# EAGLE board main ( line followers ) (EAGLE 9.6.2)
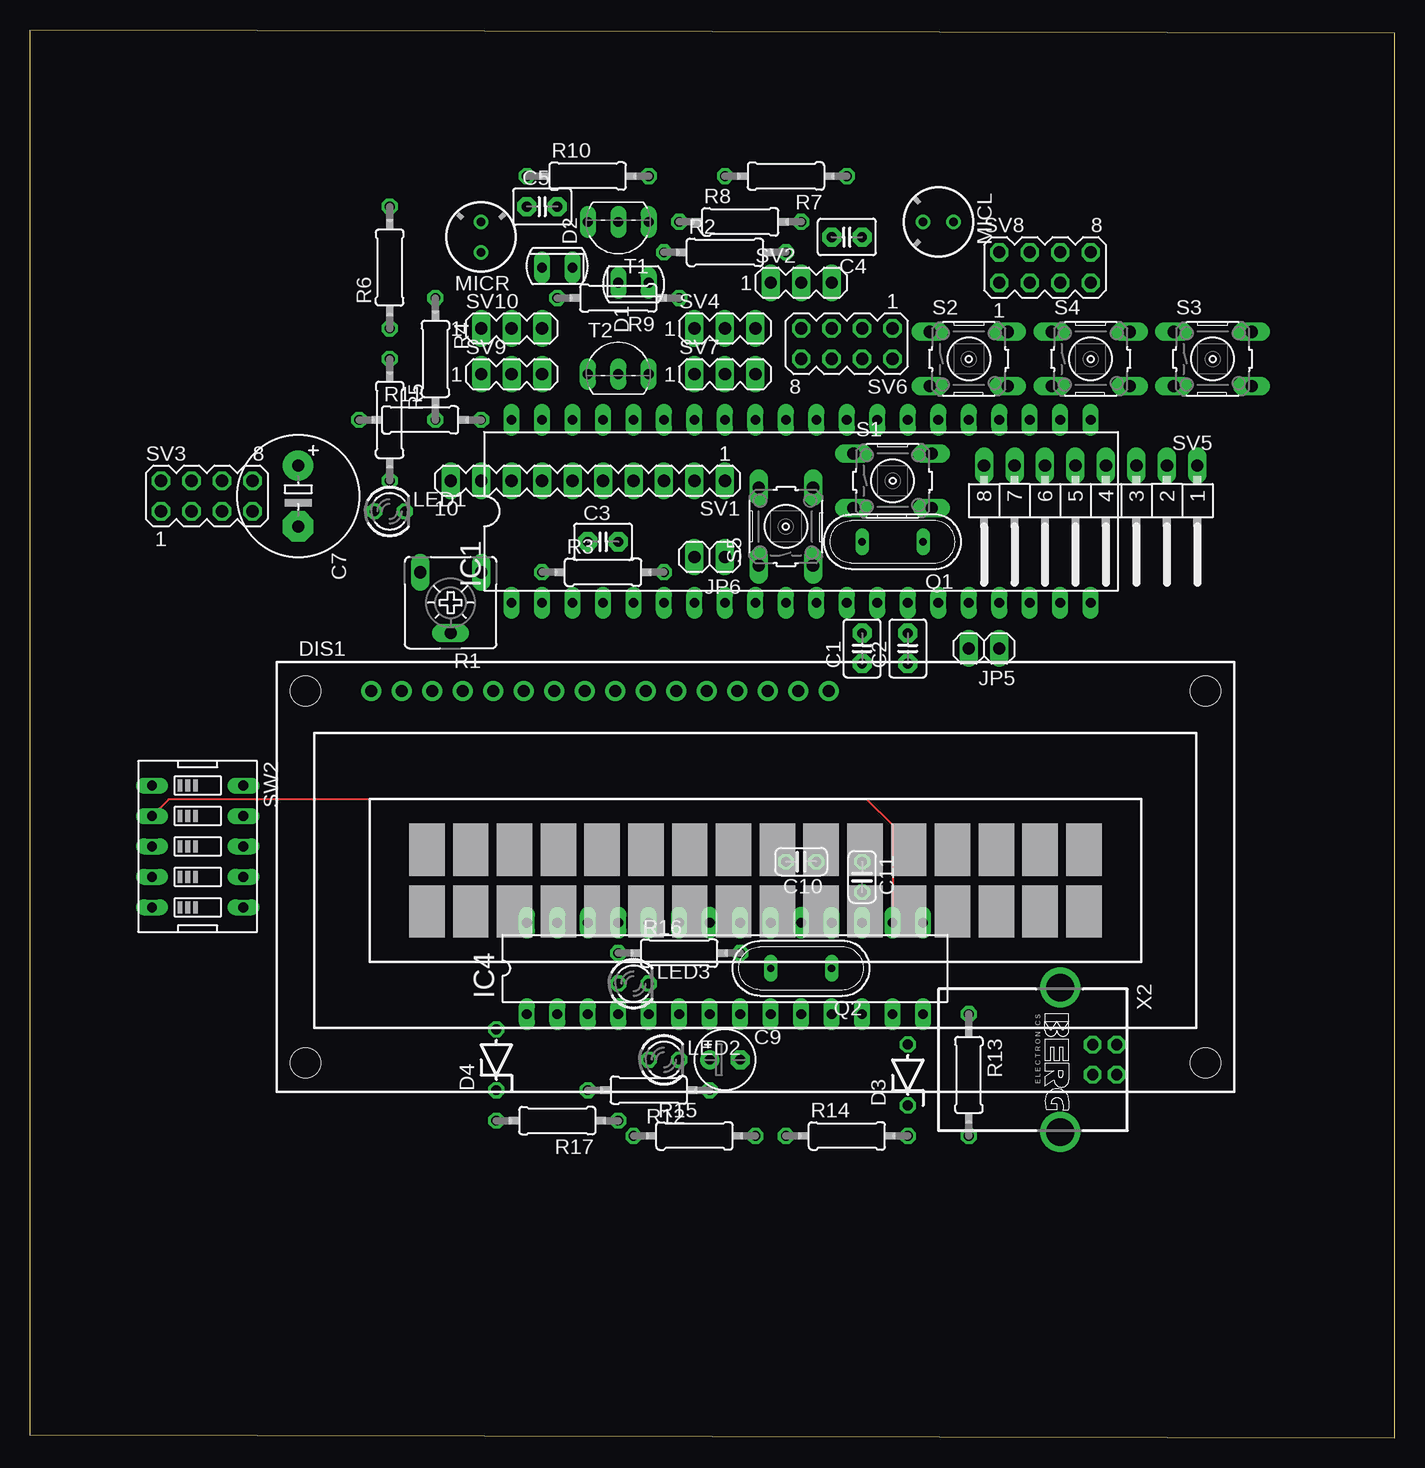
[diagram p0: board, top side]
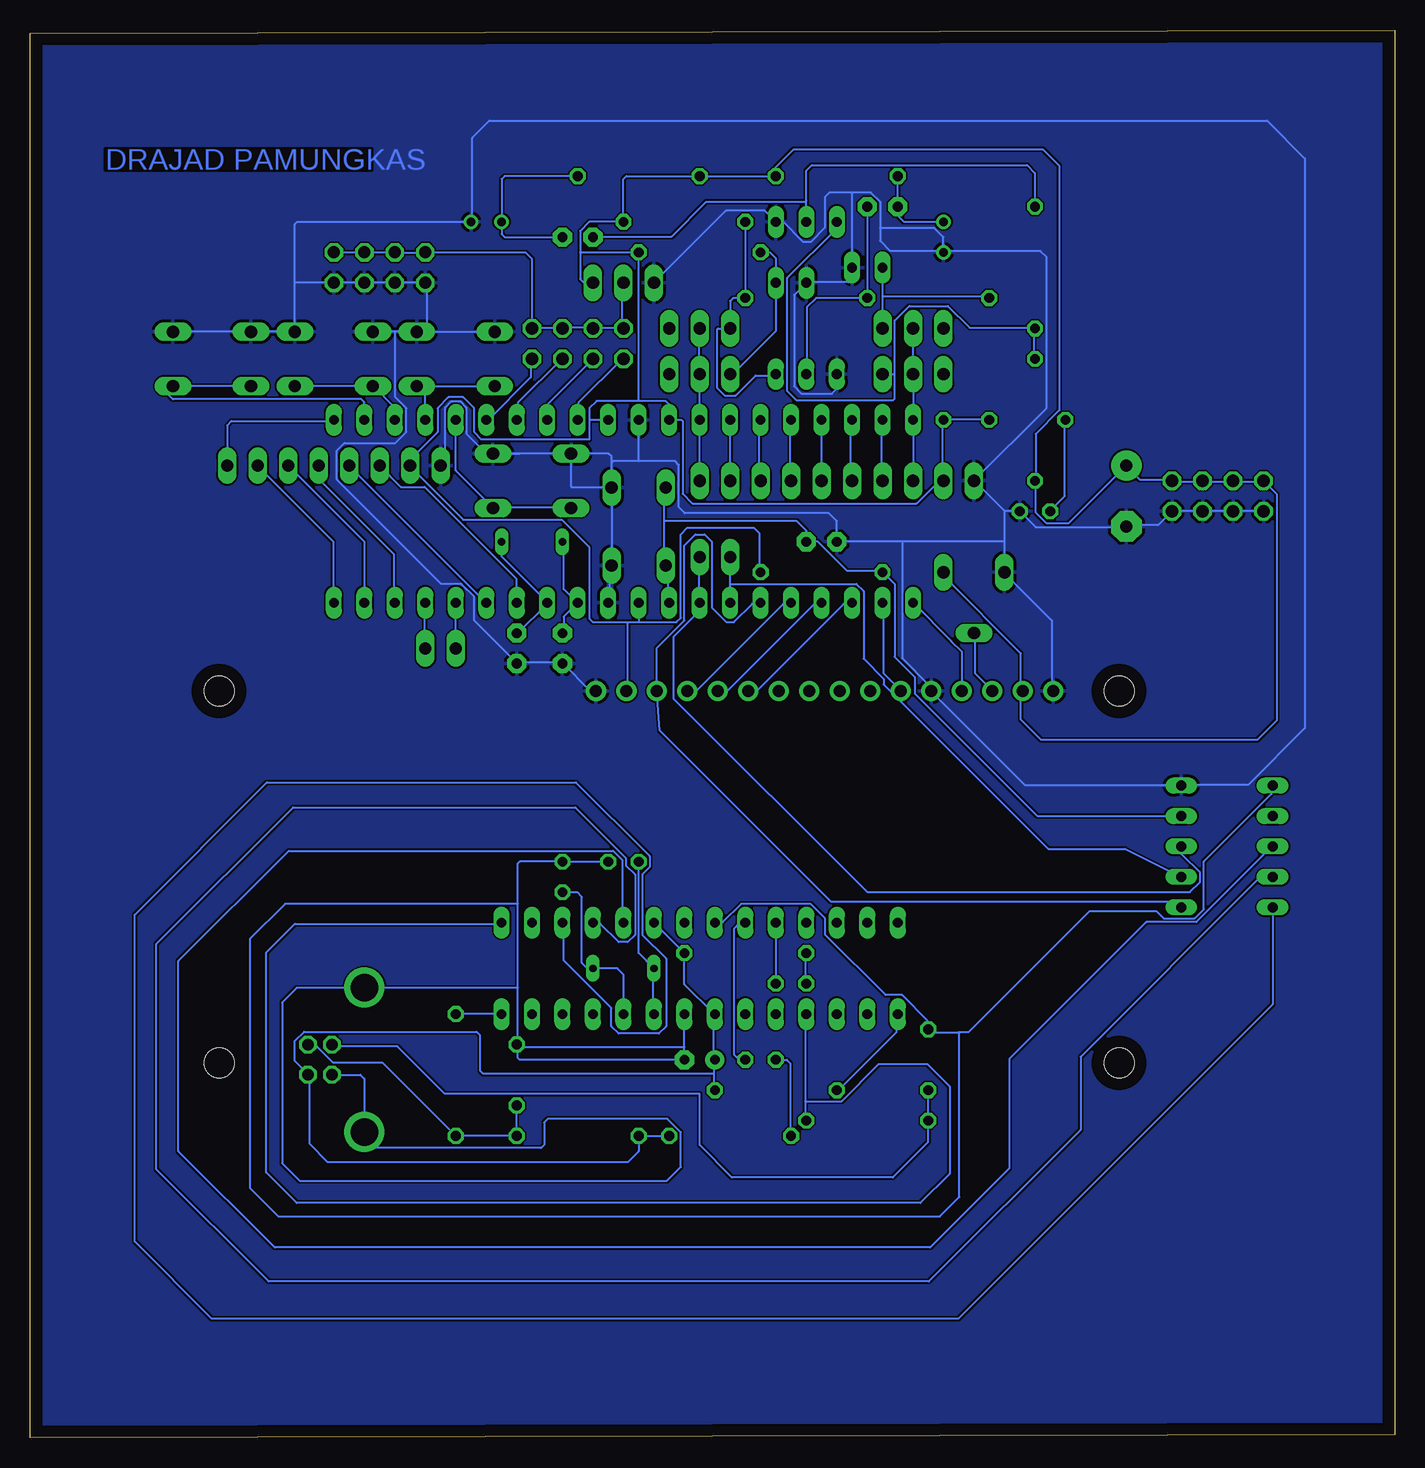
[diagram p1: board, bottom side, seen from below]

Size 113.72 x 117.34 mm. Coordinates in mm from the lower left corner, seen from the top.
Outline: 0,0.25 113.72,0 113.72,117.08 0,117.34 0,0.25
Copper layers (1*16): Top 0.035mm / dielectric 1.5mm / Bottom 0.035mm
Design rules "default": minimum track width 6mil, minimum drill 0.35mm, track to track 6mil, track to pad 6mil, pad to pad 6mil, via to via 6mil, smd to smd 6mil, copper to edge 40mil, drill to drill 6mil, minimum pad ring 10mil, minimum via ring 8mil, stop-mask expansion 4mil, vias tented up to drill 0mil, thermal gap 10mil

## Footprints (pad centres in the part's own frame; a part is rotated, then mirrored left to right if it is on the bottom)
C2.5-3 = drill 0.813 pad 1.6 octagon: 1 -1.27,0; 2 1.27,0
E5-10,5 = drill 1.016 pad 2.54: + -2.54,0 | drill 1.016 pad 2.54 octagon: - 2.54,0
E2,5-5 = drill 0.813 pad 1.6: + -1.27,0 | drill 0.813 pad 1.6 octagon: - 1.27,0
C025-024X044 = drill 0.813 octagon: 1 -1.27,0; 2 1.27,0
SFH225 = drill 0.813 long: A 0,1.27; K 0,-1.27
ZDIO-5 = drill 0.813 octagon: A 2.54,0; C -2.54,0
TUXGR_16X2_R2 = drill 1 pad 1.676: 1 -32,15.5; 2 -29.46,15.5; 3 -26.92,15.5; 4 -24.38,15.5; 5 -21.84,15.5; 6 -19.3,15.5; 7 -16.76,15.5; 8 -14.22,15.5; 9 -11.68,15.5; 10 -9.14,15.5; 11 -6.6,15.5; 12 -4.06,15.5; 13 -1.52,15.5; 14 1.02,15.5; 15 3.56,15.5; 16 6.1,15.5 | hole 2.5: -37.5,-15.5; 37.5,-15.5; -37.5,15.5; 37.5,15.5
DIL40 = drill 0.813 long: 1 -24.13,-7.62; 2 -21.59,-7.62; 3 -19.05,-7.62; 4 -16.51,-7.62; 5 -13.97,-7.62; 6 -11.43,-7.62; 7 -8.89,-7.62; 8 -6.35,-7.62; 9 -3.81,-7.62; 10 -1.27,-7.62; 11 1.27,-7.62; 12 3.81,-7.62; 13 6.35,-7.62; 14 8.89,-7.62; 15 11.43,-7.62; 16 13.97,-7.62; 17 16.51,-7.62; 18 19.05,-7.62; 19 21.59,-7.62; 20 24.13,-7.62; 21 24.13,7.62; 22 21.59,7.62; 23 19.05,7.62; 24 16.51,7.62; 25 13.97,7.62; 26 11.43,7.62; 27 8.89,7.62; 28 6.35,7.62; 29 3.81,7.62; 30 1.27,7.62; 31 -1.27,7.62; 32 -3.81,7.62; 33 -6.35,7.62; 34 -8.89,7.62; 35 -11.43,7.62; 36 -13.97,7.62; 37 -16.51,7.62; 38 -19.05,7.62; 39 -21.59,7.62; 40 -24.13,7.62
DIL28-3 = drill 0.813 long: 1 -16.51,-3.81; 2 -13.97,-3.81; 3 -11.43,-3.81; 4 -8.89,-3.81; 5 -6.35,-3.81; 6 -3.81,-3.81; 7 -1.27,-3.81; 8 1.27,-3.81; 9 3.81,-3.81; 10 6.35,-3.81; 11 8.89,-3.81; 12 11.43,-3.81; 13 13.97,-3.81; 14 16.51,-3.81; 15 16.51,3.81; 16 13.97,3.81; 17 11.43,3.81; 18 8.89,3.81; 19 6.35,3.81; 20 3.81,3.81; 21 1.27,3.81; 22 -1.27,3.81; 23 -3.81,3.81; 24 -6.35,3.81; 25 -8.89,3.81; 26 -11.43,3.81; 27 -13.97,3.81; 28 -16.51,3.81
1X02 = drill 1.016 long: 1 -1.27,0; 2 1.27,0
LED3MM = drill 0.813 octagon: A -1.27,0; K 1.27,0
F6050AP = drill 0.7 pad 1.2: 1 0,1.27; 2 0,-1.27
QS = drill 0.61 long: 1 -2.54,0; 2 2.54,0
CA6V = drill 1.016 long: A -2.54,-2.54; E 2.54,-2.54; S 0,2.54
0207/10 = drill 0.813 octagon: 1 -5.08,0; 2 5.08,0
B3F-10XX = drill 1.016 long: 1 -3.251,2.261; 2 3.251,2.261; 3 -3.251,-2.261; 4 3.251,-2.261
MA10-1 = drill 1.016 long: 1 -11.43,0; 2 -8.89,0; 3 -6.35,0; 4 -3.81,0; 5 -1.27,0; 6 1.27,0; 7 3.81,0; 8 6.35,0; 9 8.89,0; 10 11.43,0
MA03-1 = drill 1.016 long: 1 -2.54,0; 2 0,0; 3 2.54,0
MA04-2 = drill 1.016 octagon: 1 -3.81,-1.27; 2 -3.81,1.27; 3 -1.27,-1.27; 4 -1.27,1.27; 5 1.27,-1.27; 6 1.27,1.27; 7 3.81,-1.27; 8 3.81,1.27
MA08-1W = drill 1.016 long: 1 -8.89,0; 2 -6.35,0; 3 -3.81,0; 4 -1.27,0; 5 1.27,0; 6 3.81,0; 7 6.35,0; 8 8.89,0
EDG-05 = drill 0.813 long: 1 -5.08,-3.81; 2 -2.54,-3.81; 3 0,-3.81; 4 2.54,-3.81; 5 5.08,-3.81; 6 5.08,3.81; 7 2.54,3.81; 8 0,3.81; 9 -2.54,3.81; 10 -5.08,3.81
TO92-EBC = drill 0.813 long: B 0,-1.27; C 2.54,-1.27; E -2.54,-1.27
PN61729-S = drill 0.95 octagon: 1 1.25,4.71; 2 -1.25,4.71; 3 -1.25,2.71; 4 1.25,2.71 | drill 2.3 pad 2.9: S1 -6.02,0; S2 6.02,0

## Placement (x,y rotation side)
C1  22p  [C2.5-3]  69.34,65.79 90 top
C2  22p  [C2.5-3]  73.15,65.79 90 top
C3  10nF  [C2.5-3]  47.75,74.68 0 top
C4  100nF  [C2.5-3]  68.07,100.08 180 top
C5  100nF  [C2.5-3]  42.67,102.62 0 top
C7  1000uF/16V  [E5-10,5]  22.35,78.49 270 top
C9  10uF/16V  [E2,5-5]  57.91,31.5 0 top
C10  22pF  [C025-024X044]  64.26,48.01 180 top
C11  22pF  [C025-024X044]  69.34,46.74 270 top
D1  SFH225  [SFH225]  50.29,96.27 270 top
D2  SFH225  [SFH225]  43.94,97.54 90 top
D3  DZ3,6V  [ZDIO-5]  73.15,30.23 90 top
D4  DZ3,6V  [ZDIO-5]  38.86,31.5 90 top
DIS1  TUXGR_16X2_R2  [TUXGR_16X2_R2]  60.45,46.74 0 top
IC1  MEGA16-P  [DIL40]  64.26,77.22 0 top
IC4  MEGA8-P  [DIL28-3]  57.91,39.12 0 top
JP5  [1X02]  79.5,65.79 180 top
JP6  [1X02]  56.64,73.41 180 top
LED1  merah  [LED3MM]  29.97,77.22 0 top
LED2  Merah  [LED3MM]  52.83,31.5 0 top
LED3  hijau  [LED3MM]  50.29,37.85 0 top
MICL  MC  [F6050AP]  75.69,101.35 270 top
MICR  MC  [F6050AP]  37.59,100.08 180 top
Q1  8MHz  [QS]  71.88,74.68 180 top
Q2  12MHz  [QS]  64.26,39.12 180 top
R1  20K  [CA6V]  35.05,69.6 180 top
R2  56K  [0207/10]  57.91,98.81 0 top
R3  10K  [0207/10]  47.75,72.14 0 top
R4  56K  [0207/10]  33.78,89.92 270 top
R5  10K  [0207/10]  29.97,84.84 270 top
R6  100K  [0207/10]  29.97,97.54 90 top
R7  10K  [0207/10]  62.99,105.16 180 top
R8  10K  [0207/10]  59.18,101.35 0 top
R9  100K  [0207/10]  49.02,95 180 top
R10  10K  [0207/10]  46.48,105.16 0 top
R11  330  [0207/10]  32.51,84.84 0 top
R12  10K  [0207/10]  51.56,28.96 180 top
R13  68  [0207/10]  78.23,30.23 270 top
R14  2K2  [0207/10]  68.07,25.15 0 top
R15  330  [0207/10]  55.37,25.15 0 top
R16  330  [0207/10]  54.1,40.39 0 top
R17  68  [0207/10]  43.94,26.42 180 top
S1  [B3F-10XX]  71.88,79.76 0 top
S2  [B3F-10XX]  78.23,89.92 0 top
S3  [B3F-10XX]  98.55,89.92 0 top
S4  [B3F-10XX]  88.39,89.92 0 top
S5  [B3F-10XX]  62.99,75.95 90 top
SV1  [MA10-1]  46.48,79.76 180 top
SV2  [MA03-1]  64.26,96.27 0 top
SV3  [MA04-2]  14.73,78.49 0 top
SV4  [MA03-1]  57.91,92.46 0 top
SV5  [MA08-1W]  88.39,81.03 180 top
SV6  [MA04-2]  68.07,91.19 180 top
SV7  [MA03-1]  57.91,88.65 0 top
SV8  [MA04-2]  84.58,97.54 0 top
SV9  [MA03-1]  40.13,88.65 0 top
SV10  [MA03-1]  40.13,92.46 0 top
SW2  [EDG-05]  13.97,49.28 270 top
T1  [TO92-EBC]  49.02,100.08 180 top
T2  [TO92-EBC]  49.02,89.92 0 top
X2  PN61729-S  [PN61729-S]  85.85,31.5 270 top

## Library data of the parts
C1-C5 = capacitor-wima
C7 C9-C11 R2-R11 = rcl
D1 D2 = opto-trans-siemens; OC_FARNELL: unknown; OC_NEWARK: unknown
D3 D4 = diode
DIS1 = display-lcd; OC_FARNELL: unknown; OC_NEWARK: unknown
IC1 = atmel; MPN: ATMEGA16-16PU; OC_FARNELL: 9171142; OC_NEWARK: 01M6885
IC4 = atmel
JP5 JP6 = pinhead
LED1-LED3 = led
MICL MICR = microphon
Q1 Q2 SW2 = special
R1 = pot
R12-R17 = resistor
S1-S5 = switch-omron; MPN: B3F-1000; OC_FARNELL: 176432; OC_NEWARK: 36M3542
SV1-SV10 = con-lstb; OC_FARNELL: unknown; OC_NEWARK: unknown
T1 T2 = transistor
X2 = con-berg

## Nets
DGND: C9.- C10.1 C11.1 D3.A D4.A IC4.8 IC4.22 SW2.1 X2.4 X2.S1 X2.S2
GND: C1.1 C2.1 C3.1 C7.- D1.K D2.K DIS1.1 DIS1.5 DIS1.16 IC1.11 IC1.31 LED1.K MICL.1 MICR.1 R1.E S1.1 S1.2 S2.1 S2.2 S3.1 S3.2 S4.1 S4.2 S5.3 S5.4 SV1.10 SV2.1 SV3.1 SV3.3 SV3.5 SV3.7 SV5.8 SV8.1 SV8.3 SV8.5 SV8.7 SW2.10 T1.E T2.E
MISO: IC1.7 JP6.2 SW2.7
MOSI: DIS1.14 IC1.6 SW2.6
N$1: IC1.33 SV1.1 SV4.2 SV7.2
N$2: IC1.34 SV1.2
N$3: IC1.35 SV1.3
N$4: IC1.36 SV1.4
N$5: IC1.37 SV1.5
N$6: IC1.38 SV1.6
N$7: IC1.39 SV1.7
N$8: D2.A R4.1 SV10.3
N$9: IC1.24 S2.3 S2.4
N$10: DIS1.13 IC1.5
N$11: DIS1.12 IC1.4
N$12: DIS1.11 IC1.3
N$13: DIS1.6 IC1.2
N$14: R5.1 R6.1 SV9.3 T1.C
N$15: DIS1.3 R1.S
N$16: C1.2 IC1.12 Q1.2
N$17: C2.2 IC1.13 Q1.1
N$18: DIS1.4 IC1.1
N$19: D1.A R2.1 SV7.1
N$20: IC1.23 S4.3 S4.4
N$21: IC1.40 SV1.8 SV9.2 SV10.2
N$22: C4.2 R6.2 T1.B
N$23: C4.1 MICL.2 R7.1
N$24: R8.1 R9.1 SV4.1 T2.C
N$25: C5.2 R9.2 T2.B
N$26: C5.1 MICR.2 R10.1
N$27: IC1.22 S3.3 S3.4
N$28: IC1.25 S1.3 S1.4
N$30: IC1.21 SV5.1
N$32: IC1.20 SV5.2
N$33: IC1.19 SV5.3
N$34: IC1.18 SV5.4
N$35: IC1.15 SV5.5
N$36: IC1.14 SV5.6
N$37: IC1.16 JP5.2
N$38: IC1.17 JP5.1
N$41: LED1.A R11.1
N$42: IC4.1 R12.2
N$44: IC1.26 SV6.2
N$45: IC1.27 SV6.4
N$46: IC1.28 SV6.6
N$47: IC1.29 SV6.8
N$51: C10.2 IC4.9 Q2.2
N$52: C11.2 IC4.10 Q2.1
N$53: IC4.14 R13.1
N$55: LED2.A R15.1
N$56: LED3.A R16.1
N$57: IC4.23 LED2.K
N$58: IC4.24 LED3.K
N$59: D4.C R17.2 X2.3
N$67: IC4.4 IC4.15 R17.1
N$69: D3.C R13.2 R14.2 X2.2
N$175: IC4.17 SW2.5
N$176: IC4.18 SW2.4
N$177: IC4.19 SW2.3
N$178: IC4.16 SW2.2
RESET: C3.2 IC1.9 R3.1 S5.1 S5.2 SW2.9
SCK: IC1.8 JP6.1 SW2.8
VCC: C7.+ DIS1.2 DIS1.15 IC1.10 IC1.30 IC1.32 R1.A R2.2 R3.2 R4.2 R5.2 R7.2 R8.2 R10.2 R11.2 SV1.9 SV2.3 SV3.2 SV3.4 SV3.6 SV3.8 SV5.7
VDD: SV2.2 SV6.1 SV6.3 SV6.5 SV6.7 SV8.2 SV8.4 SV8.6 SV8.8
VPP: C9.+ IC4.7 IC4.20 R12.1 R14.1 R15.2 R16.2 X2.1

## Tracks (layer width: path | path; a pad name or v marks a point on that pad's centre or on a via)
DGND
  Bottom 0.152: X2.4 86.18,30.25 85.85,29.92 X2.S2 85.85,24.38 85.6,24.13 71.12,24.13 70.87,24.38 70.87,26.26 70.56,26.57 60.6,26.57 59.49,25.45 59.49,22.55 60.66,21.39 91.24,21.39 92.71,22.86 92.71,36.27 91.49,37.49 85.85,37.49 | 59.18,32.56 C9.- 72.9,31.5 73.05,31.65 73.05,32.56 | 59.18,32.56 IC4.8 | 73.05,32.87 73.05,37.49 | 73.05,37.49 73.05,44.5 | 73.05,44.5 73.05,47.85 72.9,48.01 C11.1 C10.1 | 73.05,32.56 59.18,32.56 | 73.05,37.49 85.85,37.49 | 85.85,37.49 X2.S1 | 73.05,44.5 92.46,44.5 95.4,41.55 95.4,20.83 93.02,18.44 37.9,18.44 36.27,20.07 36.27,33.73 36.32,33.78 | 36.32,33.78 38.61,33.78 D4.A 38.91,34.14 38.91,34.75 41.05,36.88 42.42,36.88 47.45,41.91 47.45,43.28 48.67,44.5 54.46,44.5 55.98,42.98 56.59,42.98 IC4.22 | 73.05,32.56 73.05,32.87 | D3.A 73.05,32.87 | SW2.1 10.26,54.25 10.26,53.64 15.9,48.01 15.9,44.04 16.66,43.28 19.25,43.28 19.86,43.89 25.42,43.89 35.53,33.78 36.32,33.78
GND
  Bottom 0.152: T2.E 46.48,87.43 46.89,87.02 49.43,87.02 50.04,87.63 50.04,95.25 D1.K 48.97,96.32 45.52,96.32 45.21,96.62 D2.K 45.21,103.78 | 42.88,100.84 42.88,103.02 43.64,103.78 45.21,103.78 | 42.88,100.84 42.88,99.77 42.01,98.91 29.51,98.91 29.01,98.4 29.01,85.8 SV1.10 34.95,79.7 32.51,77.27 | 45.21,103.78 47.09,103.78 47.45,103.43 47.45,100.89 48.67,99.67 49.28,99.67 50.95,101.35 T1.E 52.48,102.26 55.73,102.26 SV2.1 | 65.28,72.69 65.43,72.54 65.43,69.65 IC1.11 | 62.99,81.38 IC1.31 | 65.28,72.69 S5.3 | 13.46,77.27 11.02,77.27 SV3.1 | 13.46,77.27 15.9,77.27 SV3.5 16.05,77.27 18.49,77.27 SV3.7 19.71,76.05 22.3,76.05 C7.- 22.45,75.9 29.92,75.9 LED1.K 31.29,77.27 32.51,77.27 | 13.46,77.27 SV3.3 | 32.51,77.27 32.51,74.68 | 32.51,74.68 R1.E 32.51,72.09 28.55,68.12 28.55,62.33 DIS1.1 | 32.51,74.68 41.05,74.68 | 41.05,74.68 C3.1 46.48,76.4 47.14,77.06 59.16,77.06 59.64,77.55 59.64,81.08 59.94,81.38 62.99,81.38 | 41.05,74.68 41.05,64.97 38.76,62.69 38.76,62.33 DIS1.5 38.61,62.18 30.84,54.41 17.88,54.41 SW2.10 17.73,54.41 12.19,54.41 7.47,59.13 7.47,106.63 10.62,109.78 75.44,109.78 76.86,108.36 76.86,101.35 MICL.1 91.44,101.35 91.64,101.14 91.64,96.27 | 91.64,92.2 95.3,92.2 | 95.3,92.2 101.7,92.2 S3.2 | 80.67,92.2 81.43,92.2 S2.2 | 80.67,92.2 75.03,92.2 S2.1 | 83.26,92.2 81.58,92.2 S2.2 | 83.26,92.2 85.09,92.2 S4.1 | 80.82,96.32 SV8.1 | 80.67,92.2 80.67,96.16 SV8.1 | 80.67,92.2 S2.2 | 83.26,92.2 83.26,86.72 82.35,85.8 82.35,83.82 83.26,82.91 87.53,82.91 88.14,82.3 88.14,79.86 79.45,71.17 77.78,71.17 76.71,70.1 76.71,68.12 73.2,64.62 C2.1 73.05,64.62 69.39,64.62 C1.1 69.24,64.47 67.11,62.33 66.65,62.33 DIS1.16
  Bottom 0.152: 91.64,92.2 91.64,96.27 | 91.64,96.27 SV8.7 SV8.5 | SV8.1 SV8.3 | SV8.3 83.41,96.27 | 83.41,96.27 SV8.5 | MICR.1 37.59,100.08 38.35,100.84 42.88,100.84 | 68.66,82.04 S1.1 68.63,79.3 68.53,79.2 S5.4 | 72.9,82.04 65.53,82.04 65.25,81.76 65.25,81.28 | 72.9,82.04 75.69,82.04 77.34,83.69 77.34,85.87 77.86,86.38 78.6,86.38 79.12,85.87 79.12,81.41 SV5.8 | S5.4 65.25,72.72 65.28,72.69 | S5.4 65.25,81.28 | 62.99,81.38 65.15,81.38 65.25,81.28 | S1.2 72.92,82.02 72.9,82.04 | SV8.3 83.41,96.32 83.41,96.27 | 91.64,92.2 S4.2 | 85.85,96.32 SV8.5 | 95.3,92.2 S3.1
  pour Bottom: 0,117.35 0,0 113.79,0 113.79,117.35
MISO
  Bottom 0.152: IC1.7 55.37,71.17 | 55.37,71.17 JP6.2 | 55.37,71.17 44.86,71.17 44.25,70.56 44.25,64.92 42.57,63.25 42.57,62.79 28.85,49.07 22.45,49.07 SW2.7
MOSI
  Bottom 0.152: SW2.6 18.29,44.7 46.99,44.7 61.24,58.95 DIS1.14 61.47,62.33 61.47,65.84 59.18,68.12 59.18,74.37 58.27,75.29 57.51,75.29 56.9,74.68 56.9,69.19 55.68,67.97 55.07,67.97 53.54,69.49 52.93,69.49 IC1.6
N$1
  Bottom 0.152: SV1.1 57.96,79.86 57.96,84.73 IC1.33 57.96,84.89 57.96,88.54 SV7.2 57.96,88.7 57.96,92.35 SV4.2
N$2
  Bottom 0.152: SV1.2 IC1.34
N$3
  Bottom 0.152: IC1.35 52.93,84.73 52.93,79.86 SV1.3
N$4
  Bottom 0.152: IC1.36 50.34,84.73 50.34,79.86 SV1.4
N$5
  Bottom 0.152: SV1.5 IC1.37
N$6
  Bottom 0.152: IC1.38 45.31,84.73 45.31,79.86 SV1.6
N$7
  Bottom 0.152: IC1.39 42.72,84.73 42.72,79.86 SV1.7
N$8
  Bottom 0.152: R4.1 33.88,95.1 42.67,95.1 | 42.57,97.54 D2.A 42.67,95.1 | SV10.3 42.67,95.1
N$9
  Bottom 0.152: 80.82,87.02 80.82,84.89 IC1.24 | 80.82,87.02 81.43,87.63 S2.4 80.82,87.02 | 80.82,87.02 80.21,87.63 75.03,87.63 S2.3
N$10
  Bottom 0.152: IC1.5 50.34,69.49 50.95,69.49 58.12,62.33 58.88,62.33 DIS1.13
N$11
  Bottom 0.152: IC1.4 47.75,69.49 48.36,69.49 55.52,62.33 56.29,62.33 DIS1.12
N$12
  Bottom 0.152: IC1.3 45.31,69.49 45.92,69.49 53.09,62.33 53.85,62.33 DIS1.11
N$13
  Bottom 0.152: IC1.2 42.57,69.49 42.57,63.7 41.2,62.33 DIS1.6
N$14
  Bottom 0.152: R5.1 30.07,89.92 30.07,92.35 R6.1 30.07,92.51 35.41,92.51 37.24,94.34 40.44,94.34 41.66,93.12 41.66,88.65 | T1.C 46.53,101.35 46.53,100.74 50.6,96.67 50.6,87.22 49.84,86.46 41.81,86.46 41.66,86.61 41.66,88.65 | SV9.3 41.66,88.65
N$15
  Bottom 0.152: R1.S 34.95,67.06 34.95,63.7 33.58,62.33 DIS1.3
N$16
  Bottom 0.152: Q1.2 69.24,74.68 69.24,70.71 68.17,69.65 IC1.12 69.24,68.43 69.24,67.06 C1.2
N$17
  Bottom 0.152: Q1.1 74.42,73.46 70.61,69.65 IC1.13 70.61,69.49 73.05,67.06 C2.2
N$18
  Bottom 0.152: IC1.1 36.93,66.4 36.93,66.38 36.07,65.53 DIS1.4
N$19
  Bottom 0.152: R2.1 52.07,98.81 51.56,98.3 D1.A 51.56,92.25 55.17,88.65 SV7.1
N$20
  Bottom 0.152: IC1.23 83.41,84.89 83.41,85.95 85.09,87.63 S4.3 85.24,87.63 91.64,87.63 S4.4
N$21
  Bottom 0.152: SV1.8 IC1.40 SV9.2 SV10.2
N$22
  Bottom 0.152: C4.2 66.8,100.13 60.25,100.13 57.35,103.02 49.12,103.02 49.02,103.12 | T1.B 49.02,103.12 | 49.02,103.12 49.02,105.61 48.56,106.07 30.63,106.07 29.97,105.41 R6.2
N$23
  Bottom 0.152: R7.1 74.17,105.16 74.42,104.9 MICL.2 74.42,100.33 74.17,100.08 C4.1
N$24
  Bottom 0.152: T2.C 51.56,88.54 53.24,88.54 54.91,86.87 55.83,86.87 56.44,87.48 56.44,92.41 56.39,92.46 SV4.1 55.37,94.74 55.12,95 R9.1 R8.1
N$25
  Bottom 0.152: C5.2 R9.2 48.21,95 48.97,94.23 48.97,88.7 T2.B
N$26
  Bottom 0.152: MICR.2 40.89,101.35 41.4,101.85 C5.1 R10.1
N$27
  Bottom 0.152: IC1.22 85.85,86.31 86.11,86.56 101.8,86.56 102.11,86.87 102.11,87.35 S3.4 S3.3
N$28
  Bottom 0.152: IC1.25 78.23,80.62 75.18,77.57 S1.4 75.03,77.57 68.63,77.57 S1.3
N$30
  Bottom 0.152: IC1.21 88.44,84.73 96.93,84.73 97.28,84.38 SV5.1
N$32
  Bottom 0.152: IC1.20 88.44,69.65 88.44,74.68 94.69,80.92 SV5.2
N$33
  Bottom 0.152: IC1.19 85.85,74.68 SV5.3
N$34
  Bottom 0.152: IC1.18 83.41,69.65 83.41,73.66 89.66,79.91 SV5.4
N$35
  Bottom 0.152: IC1.15 75.79,69.65 87.07,80.92 SV5.5
N$36
  Bottom 0.152: SV5.6 82.8,79.25 80.82,79.25 73.2,71.63 73.2,69.65 IC1.14
N$37
  Bottom 0.152: JP5.2 IC1.16
N$38
  Bottom 0.152: IC1.17 80.82,69.49 80.82,65.84 JP5.1
N$41
  Bottom 0.152: R11.1 27.48,84.73 27.48,78.49 28.7,77.27 LED1.A
N$42
  Bottom 0.152: IC4.1 41.5,35.2 41.5,33.83 46.38,28.96 R12.2
N$44
  Bottom 0.152: SV6.2 71.98,89.92 71.98,88.39 75.54,84.84 IC1.26
N$45
  Bottom 0.152: IC1.27 73.05,84.89 73.05,86.26 69.39,89.92 SV6.4
N$46
  Bottom 0.152: IC1.28 70.61,86.11 SV6.6
N$47
  Bottom 0.152: IC1.29 68.02,84.89 68.02,86.26 64.36,89.92 SV6.8
N$51
  Bottom 0.152: IC4.9 61.77,35.36 61.77,39.01 Q2.2 62.99,40.39 C10.2
N$52
  Bottom 0.152: IC4.10 64.26,38.61 64.77,39.12 Q2.1 67.26,39.12 67.72,39.57 67.72,45.06 68.12,45.47 C11.2
N$53
  Bottom 0.152: IC4.14 74.42,35.36 78.23,35.36 R13.1
N$55
  Bottom 0.152: LED2.A 50.65,31.5 50.34,31.19 50.34,25.15 R15.1
N$56
  Bottom 0.152: LED3.A 49.12,37.95 49.12,40.39 R16.1
N$57
  Bottom 0.152: IC4.23 54.56,42.93 55.07,42.42 55.07,31.95 54.61,31.5 LED2.K
N$58
  Bottom 0.152: IC4.24 LED3.K
N$59
  Bottom 0.152: 38.91,28.96 D4.C 38.86,26.52 | X2.3 88.44,32.61 83.11,32.61 79.15,28.65 57.91,28.65 57.91,24.38 55.22,21.69 41.81,21.69 38.86,24.64 R17.2 | R17.2 38.86,26.52 | R17.2 38.91,26.52 38.86,26.52
N$67
  Bottom 0.152: 49.12,28.04 49.12,35.2 IC4.4 | 49.12,28.04 49.12,26.52 R17.1 | 49.12,28.04 46.08,28.04 42.98,31.14 38.96,31.14 37.08,29.26 37.08,22 39.52,19.56 91.49,19.56 94.03,22.1 94.03,40.44 91.64,42.82 74.42,42.82 IC4.15
N$69
  Bottom 0.152: 73.2,25.15 73.2,27.58 D3.C | 73.2,25.15 R13.2 84.33,31.24 88.44,31.24 89.81,32.61 90.42,32.61 X2.2 | 73.2,25.15 R14.2
N$175
  Bottom 0.152: SW2.5 10.16,36.12 36.37,9.91 98.55,9.91 105,16.36 105,43.59 93.98,54.61 68.22,54.61 62.08,48.46 62.08,47.55 62.69,46.94 62.69,41.91 60.71,39.93 60.71,34.29 61.32,33.68 64.67,33.68 65.28,34.29 65.28,35.81 69.24,39.78 69.24,42.82 IC4.17
N$176
  Bottom 0.152: SW2.4 11.18,46.74 26.16,31.75 26.16,25.65 38.81,13.01 93.83,13.01 103.17,22.35 103.17,41.15 91.8,52.53 68.28,52.53 64.06,48.31 64.06,47.7 63.3,46.94 63.3,41.91 63.91,41.3 64.67,41.3 66.19,42.82 66.8,42.82 IC4.18
N$177
  Bottom 0.152: IC4.19 64.36,42.98 64.36,48.16 65.13,48.92 92.15,48.92 101.35,39.73 101.35,23.88 93.32,15.85 38.71,15.85 32.11,22.45 32.11,31.55 20.68,42.98 16.51,42.98 10.26,49.23 SW2.3
N$178
  Top 0.152: SW2.2 11.56,53.21 69.72,53.21 71.88,51.05 IC4.16
RESET
  Bottom 0.152: IC1.9 60.55,69.65 60.55,72.54 60.71,72.69 S5.1 60.86,72.69 60.86,76.4 | 60.86,76.4 60.86,79.1 S5.2 | 60.86,76.4 49.84,76.4 49.02,75.59 C3.2 48.06,74.68 45.62,72.24 42.72,72.24 R3.1 42.57,72.09 41.66,71.17 41.66,65.08 39.98,63.4 39.98,62.03 29.77,51.82 SW2.9
SCK
  Bottom 0.152: JP6.1 57.96,73.3 57.96,69.65 IC1.8 57.96,69.49 57.96,68.88 60.1,66.75 60.1,61.62 43.94,45.47 17.07,45.47 16.2,46.33 16.2,47.09 17.73,48.62 17.73,49.23 SW2.8
VCC
  Bottom 0.152: 31.14,62.38 31.14,65.38 37.54,71.78 37.54,72.09 R1.A | 13.46,79.7 11.02,79.7 SV3.2 9.8,78.64 9.8,59.79 11.43,58.17 29.46,58.17 31.14,59.84 31.14,62.38 | 13.46,79.7 15.9,79.7 SV3.6 16.05,79.7 18.49,79.7 SV3.8 18.64,79.86 21.23,79.86 22.3,80.92 C7.+ 27.18,76.2 29.01,76.2 29.92,77.11 29.92,79.7 R5.2 29.92,79.86 29.92,83.67 27.94,85.65 27.94,106.02 29.31,107.39 50.09,107.39 51.56,105.92 R10.2 R7.2 | 13.46,79.7 SV3.4 | 57.96,105.16 R7.2 | R3.2 52.93,72.24 52.93,75.39 53.39,75.84 58.93,75.84 59.49,75.29 59.49,68.33 59.84,67.97 62.99,67.97 | DIS1.15 63.91,62.33 63.91,67.92 63.86,67.97 | R4.2 33.88,84.89 37.54,84.89 R11.2 37.69,84.73 37.69,79.86 SV1.9 37.69,79.7 38,79.7 39.83,77.88 58.52,77.88 59.33,78.69 59.33,84.73 59.44,84.84 IC1.32 60.45,86.11 60.76,86.41 62.99,86.41 | 62.99,86.41 62.99,98.75 | 62.99,98.75 R2.2 | 63.86,67.97 62.99,67.97 | IC1.10 62.99,67.97 | 63.86,67.97 66.8,67.97 67.11,68.28 67.11,74.22 69.39,76.5 77.62,76.5 82.04,80.92 SV5.7 82.04,81.53 79.76,83.82 79.76,85.8 78.84,86.72 77.62,86.72 76.71,85.8 76.71,83.82 76.1,83.21 67.11,83.21 67.11,84.84 | DIS1.2 31.14,62.38 | 67.11,84.84 67.11,85.8 66.5,86.41 62.99,86.41 | IC1.30 67.11,84.84 | R7.2 64.01,105.16 64.26,104.9 R8.2 67.11,101.35 67.87,100.58 67.87,98.81 | SV2.3 67.56,96.27 67.87,96.57 67.87,98.81 | 62.99,98.75 67.82,98.75 67.87,98.81
VDD
  Bottom 0.152: 85.85,98.75 83.41,98.75 SV8.4 83.26,98.75 80.82,98.75 SV8.2 80.67,98.75 72.39,98.75 71.88,98.25 SV6.1 71.83,92.51 69.39,92.51 SV6.3 69.24,92.51 66.8,92.51 | 85.85,98.75 88.29,98.75 SV8.8 | 85.85,98.75 SV8.6 | 66.8,92.51 64.36,92.51 | 64.36,92.51 64.36,96.16 SV2.2 | 64.36,92.51 SV6.7 | 66.8,92.51 SV6.5
VPP
  Bottom 0.152: IC4.20 R16.2 59.18,37.8 56.74,35.36 IC4.7 56.74,35.2 56.74,31.55 C9.+ 56.74,31.39 56.74,30.33 | 56.74,30.33 56.74,28.96 R12.1 | R15.2 R14.1 62.99,23.88 63.91,22.96 88.9,22.96 90.42,24.49 90.42,30.18 X2.1 90.58,30.33 91.64,31.39 91.64,33.07 90.88,33.83 76.5,33.83 76.2,33.53 76.2,30.58 75.95,30.33 56.74,30.33

## Text on the board
Bottom: DRAJAD PAMUNGKAS